# Altium PCB PCB_Sensor_Board.PcbDoc
Units mm, origin at the board's own origin, x right, y up, seen from the top; angles counter-clockwise.
Board outline 27 x 27 mm, 2 copper layers (Top Layer, Bottom Layer), stack 1.569 mm thick; 18 components, 6 nets, 44 pads, 7 vias.
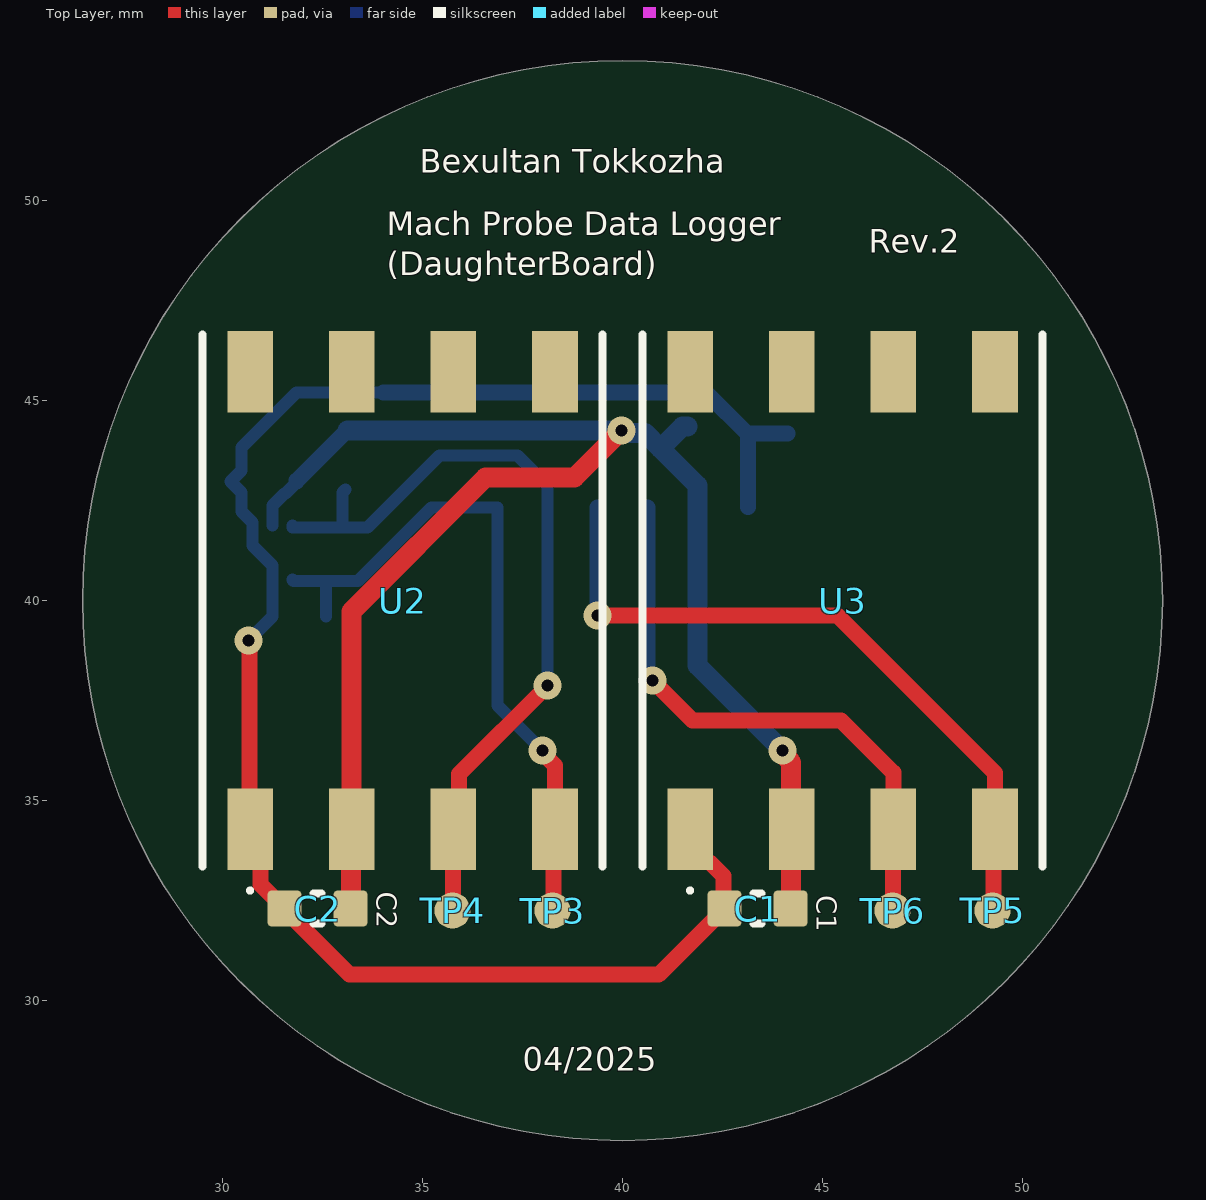
[diagram p0: Top Layer view]
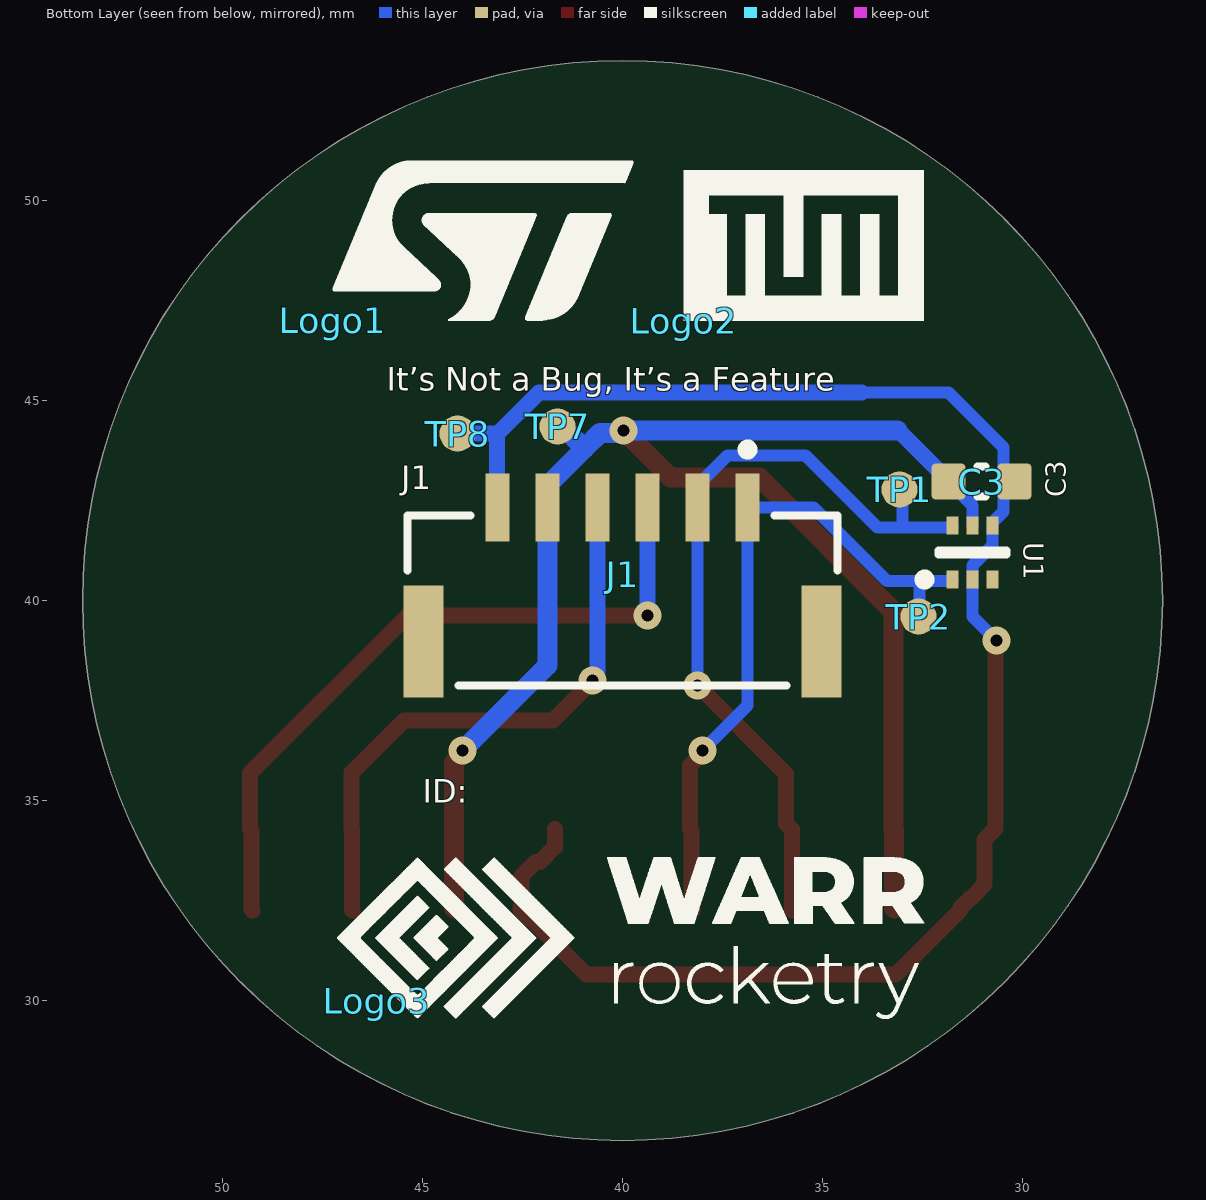
[diagram p1: Bottom Layer view, seen from below]

## Layer stack, top to bottom
Top Solder: solder mask 0.0254, SM-001, Dk 4
Top Layer: signal copper 0.035
Dielectric 1: core 1.4986, Core-043, Dk 4.3
Bottom Layer: signal copper 0.035
Bottom Solder: solder mask 0.0254, SM-001, Dk 4

## Board outline
40,26.5 cw(c40,40) 26.5,40 cw(c40,40) 40,53.5 cw(c40,40) 53.5,40 cw(c40,40)

## Design rules (kind name [scope] priority, off if disabled: settings)
Clearance [All] p1: gap=0.1 ignorepadtopadclearanceinfootprint=FALSE
HoleToHoleClearance [All] p1: gap=0.2 allowstackedmicrovias=TRUE
MinimumSolderMaskSliver [All] p1: minsoldermaskwidth=0.1
PolygonConnect [All] p1: connectstyle=Direct reliefconductorwidth=0.254 reliefentries=4 polygonreliefangle="90 Angle" airgapwidth=0.254
RoutingVias [All] p1: holewidth=0.711 width=1.27 viastyle="Through Hole" minholewidth=0.3 minwidth=0.7 maxholewidth=0.711 maxwidth=1.27
SilkToSolderMaskClearance [IsPad] p1: minsilkscreentomaskgap=0.1 clearancetoexposedcopper=TRUE
SolderMaskExpansion [All] p1: expansion=0.102 istentingtop=FALSE
SupplyNets "Schematic Supply Nets_2" [InNet('+3V3')] p1: voltage=0.000
SupplyNets "Schematic Supply Nets" [InNet('GND')] p2: voltage=0.000
UnRoutedNet [All] p1: checkbadconnections=TRUE
Width [All] p1: maxlimit=0.5 minlimit=0.1 preferedwidth=0.254
26 further rules are at their usual default settings.

## Classes and differential pairs
component class Sensor_Board: C1 C2 C3 J1 Logo1 Logo2 Logo3 TP1 TP2 TP3 TP4 TP5 TP6 TP7 U1 U2 U3

## Components (designator, comment, footprint, x,y, rotation, side; value= is the part's Value field where it differs from the comment)
C1 "C_0603_100n_5%_50V" CAP_0603 43.375,32.3 r180 top value=100nF
C2 "C_0603_100n_5%_50V" CAP_0603 32.375,32.3 r180 top value=100nF
C3 "C_0603_10n_5%_50V" CAP_0603 31.025,42.975 r180 bottom value=10nF
J1 "BM06B-GHS-TBT(LF)(SN)" FP-BM06B-GHS-TBT_LF_SN-MFG 40,40 r0 bottom
Logo1 "ST Microelectronics Logo" "New footprint 1" 47.25,47 r180 bottom
Logo2 "TUM Logo" "New footprint 1" 38.475,47 r180 bottom
Logo3 "WARR Rocketry Logo" "WARR Rocketry Logo-Footprint-1" 46.15,30 r180 bottom
TP1 "Testpoint" Testpoint-Footprint-1 33.075,42.775 r270 bottom
TP2 "Testpoint" Testpoint-Footprint-1 32.6,39.6 r270 bottom
TP3 "Testpoint" Testpoint-Footprint-1 38.25,32.25 r270 top
TP4 "Testpoint" Testpoint-Footprint-1 35.75,32.25 r270 top
TP5 "Testpoint" Testpoint-Footprint-1 49.25,32.25 r270 top
TP6 "Testpoint" Testpoint-Footprint-1 46.75,32.25 r270 top
TP7 "Testpoint" Testpoint-Footprint-1 41.625,44.35 r270 bottom
TP8 "Testpoint" Testpoint-Footprint-1 44.125,44.175 r270 bottom
U1 "TMP102AIDRLR" SOTFL127P600-8N 31.25,41.2 r90 bottom
U2 "HSCMAND150PA4A3" HSCMAND150PA4A3 34.5,40 r0 top
U3 "HSCMAND150PA4A3" HSCMAND150PA4A3 45.5,40 r0 top

## Footprints (in the part's own frame and the unit in brackets; to place one, negate y for a bottom-side part, rotate by r counter-clockwise, add the part's x,y. Pads: shape width x height; smd on the part's side, far side on the other; paste and mask are expansions set on the pad)
CAP_0603 [mm] "Chip Capacitor, 2-Leads, Body 1,60x0,80mm, IPC Medium Density"
  rrect25% 0.85x0.9 smd: 1(-0.825,0) 2(0.825,0)
  silkscreen extent -0.1,-0.38 0.1,0.38, body extent -0.85,-0.45 0.85,0.45, height 0.55
FP-BM06B-GHS-TBT_LF_SN-MFG [mm]
  rect 0.6x1.7 smd paste+0 mask+0: 1(-3.125,-2.325) 2(-1.875,-2.325) 3(-0.625,-2.325) 4(0.625,-2.325) 5(1.875,-2.325) 6(3.125,-2.325)
  rect 1x2.8 smd paste+0 mask+0: 7(-4.975,1.025) 8(4.975,1.025)
  silkscreen extent -5.38,-3.9 5.38,2.12, body extent -5.38,-2.82 5.37,2.13, height 4.17
HSCMAND150PA4A3 [mil]
  rect 45x80 smd: 1(-150,-225.04) 2(-50,-225.04) 3(50,-225.04) 4(150,-225.04) 5(150,225.04) 6(50,225.04) 7(-50,225.04) 8(-150,225.04)
  silkscreen extent -197,-287 197,262, body extent -197,-262 197,262, height 583
"New footprint 1" [mm]
  silkscreen extent 0,0 7.52,4
SOTFL127P600-8N [mm]
  rect 0.45x0.3 smd paste+0.05: 1(-0.675,0.5) 2(-0.675,0) 3(-0.675,-0.5) 4(0.675,-0.5) 5(0.675,0) 6(0.675,0.5)
  silkscreen extent -0.8,-0.85 0.05,1.33, body extent -0.8,-0.85 0.8,0.85, height 0.6
Testpoint-Footprint-1 [mm]
  round 0.9 smd paste-0.45 mask+0.1: 1(0,0)
"WARR Rocketry Logo-Footprint-1" [mm]
  silkscreen extent -0.98,-0.46 13.7,3.58

## Part data
C1 C2: library part CMP-001-00115-4, "Ceramic Capacitor, Multilayer, Ceramic, 50V, 5% +Tol, 5% -Tol, X7R, 15% TC, 0.1uF, Surface Mount, 0603", Capacitor Type=Ceramic, Case/Package=0603, Max Operating Temperature=125°C, Min Operating Temperature=-55°C, Voltage Rating=50V, Mounting Technology="Surface Mount", Pins=2, RoHS Compliant=Yes
C3: library part CMP-001-00107-9, "Ceramic Capacitor, Multilayer, Ceramic, 50V, 5% +Tol, 5% -Tol, X7R, 15% TC, 0.01uF, Surface Mount, 0603", Capacitor Type=Ceramic, Case/Package=0603, Max Operating Temperature=125°C, Min Operating Temperature=-55°C, Tolerance=5%, Voltage Rating=50V, Mounting Technology="Surface Mount", Pins=2, RoHS Compliant=Yes
J1: library part CMP-17439-000166-1, "CONN HEADER SMD 6POS 1.25MM", Current Rating=1A, Housing Color=Natural, Voltage Rating=50V, Contact Material=Bronze, Housing Material=Nylon, Lead Free="Lead Free", Mount="Surface Mount", Number of Contacts=6, Number of Positions=6, Number of Rows=1, Orientation=Straight, Packaging="Cut Tape", Pitch=1.25mm, Series=GH, Termination=Solder
Logo1: library part CMP-00030-00023-1, "ST Microelectronics Logo 6x4mm"
Logo2: library part CMP-00030-00022-1, "6 x 4 mm TUM Logo"
Logo3: library part CMP-00030-00024-1, "Warr Rocketry Logo"
TP1 TP2 TP3 TP4 TP5 TP6 TP7 TP8: library part CMP-00030-00002-7, "Schematic for Testpoint"
U1: library part CMP-00053-2, "Digital Temperature Sensor, I2C,12 Bit(s), ±2C, SOT563", LCSC Part Number=C99269, Max Operating Temperature=125°C, Min Operating Temperature=-40°C, Mouser Part Number=595-TMP102AIDRLR
U2 U3: "Undefined or Miscellaneous", Manufacturer_Name=Honeywell, Mouser Part Number=785-HSCMAND150PA4A3, Arrow Part Number=HSCMAND150PA4A3, Arrow Price/Stock=https://www.arrow.com/en/products/hscmand150pa4a3/honeywell?region=nac, Datasheet Link=https://prod-edam.honeywell.com/content/dam/honeywell-edam/sps/siot/en-us/products/sensors/pressure-sensors/board-mount-pressure-sensors/trustability-hsc-series/documents/sps-siot-trustability-hsc-series-high-accuracy-board-mount-pressure-sensors-50099148, Height=14.72mm, Manufacturer_Part_Number=HSCMAND150PA4A3, Mouser Price/Stock=https://www.mouser.co.uk/ProductDetail/Honeywell/HSCMAND150PA4A3?qs=o9%252Bd3bvuvbJEKEw%2FoGffSA%3D%3D

## Via types
v1: diameter 0.7, hole 0.3, Top Layer to Bottom Layer, tented both sides, 7 vias

## Nets (pads, with @x,y where several pads share a name; then routed paths per layer and width w, separated by ;. In a path a pad name is that pad's centre, name@x,y a point inside that pad or via, vN(x,y) a via of type N, cw(c..) or ccw(c..) an arc to the next point about the centre after c; other vN are vias at no path point)
+3V3: C1.1 C2.1 C3.1 J1.5 TP7.1 U1.5 U2.2 U3.2 | length 41
  Top Layer w0.5: C2.1 33.215,32.315 33.215,34.269 U2.2 33.23,39.73 36.575,43.075 38.8,43.075 v1(39.975,44.25) ; v1(44,36.25) 44,36.169 44.215,35.954 44.215,32.315 C1.1
  Bottom Layer w0.3: U1.5 31.25,42.375 31.55,42.675 31.575,42.675 31.85,42.95 C3.1
  Bottom Layer w0.4: C3.1 31.85,43 33.1,44.25 33.125,44.25
  Bottom Layer w0.5: 33.125,44.25 v1(39.975,44.25) 40.032,44.193 40.557,44.193 40.95,43.8 ; TP7.1 41.5,44.35 40.95,43.8 ; v1(44,36.25) 41.875,38.375 J1.5 41.875,42.875 40.95,43.8
GND: C1.2 C2.2 C3.2 J1.6 TP8.1 U1.2 U1.4 U2.1 U3.1 | length 44
  Top Layer w0.4: v1(30.65,39) 30.67,38.98 30.67,34.304 U2.1 30.946,34.028 30.946,32.904 31.3,32.55 31.325,32.55 31.55,32.325 C2.2 31.55,32.275 33.175,30.65 40.9,30.65 42.3,32.05 42.325,32.05 42.55,32.275 C1.2 42.55,32.325 42.519,32.356 42.519,33.116 42.167,33.468 42.062,33.468 41.69,33.839 U3.1
  Bottom Layer w0.3: v1(30.65,39) 31.25,39.6 U1.2 31.25,40.875 30.75,41.375 U1.4 30.75,41.95 30.475,42.225 30.475,42.7 C3.2 30.475,43.25 30.475,43.825 31.85,45.2 34.025,45.2
  Bottom Layer w0.4: 34.025,45.2 42.089,45.2 43.139,44.15 ; J1.6@43.139,42.339 43.139,44.15 ; TP8.1 43.164,44.175 43.139,44.15
I2C1_SCL: J1.1 TP2.1 TP3.1 U1.1 U2.4 | length 17.5
  Top Layer w0.4: v1(38,36.25) 38,36.187 38.31,35.877 U2.4 38.28,34.254 38.28,32.28 TP3.1
  Bottom Layer w0.3: U1.1 31.75,40.512 31.775,40.487 32.581,40.487 ; TP2.1@32.581,39.6 32.581,40.487 ; v1(38,36.25) 36.875,37.375 J1.1 35.225,42.325 33.387,40.487 32.581,40.487
I2C1_SDA: J1.2 TP1.1 TP4.1 U1.6 U2.3 | length 20.1
  Top Layer w0.4: TP4.1 35.76,32.26 35.76,34.274 U2.3 35.916,34.43 35.916,35.666 v1(38.125,37.875)
  Bottom Layer w0.3: U1.6 31.75,41.825 32.95,41.825 ; TP1.1 33,42.7 33,41.875 32.95,41.825 ; v1(38.125,37.875) J1.2 38.125,42.875 37.375,43.625 35.425,43.625 33.625,41.825 32.95,41.825
I2C2_SCL: J1.3 TP5.1 U3.4 | length 17.7
  Top Layer w0.4: v1(39.375,39.625) 45.375,39.625 49.31,35.69 U3.4 49.28,34.254 49.28,32.28 TP5.1
  Bottom Layer w0.4: v1(39.375,39.625) J1.3
I2C2_SDA: J1.4 TP6.1 U3.3 | length 14.8
  Top Layer w0.4: v1(40.75,38) 41.75,37 45.468,37 46.77,35.698 U3.3 46.76,34.274 46.76,32.26 TP6.1
  Bottom Layer w0.4: J1.4 40.625,38.206 40.75,38.081 v1(40.75,38)
pads on no net: J1.7 J1.8 U1.3 U2.5 U2.6 U2.7 U2.8 U3.5 U3.6 U3.7 U3.8

## Silkscreen, mask and mechanical layers (free items; w line width, h text height)
Top Overlay:
  text "Bexultan Tokkozha" at 34.931,50.5 h1
  text "Rev.2" at 46.15,48.5 h1
  text "Mach Probe Data Logger  / (DaughterBoard)" at 34.109,47.933 h1
  text "04/2025" at 37.5,28.05 h1
Bottom Overlay:
  text "It’s Not a Bug, It’s a Feature" at 45.9,45.05 h1
  text "ID:" at 45,34.75 h1
Mechanical 1:
  circle w0.254: c40,40 r13.5